# Altium PCB 51MCU最小系统.PcbDoc
Units mil, origin at the board's own origin, x right, y up, seen from the top; angles counter-clockwise.
Board outline 6000 x 4000 mil, 2 copper layers (Top Layer, Bottom Layer); 14 components, 41 nets, 107 pads, 0 vias.
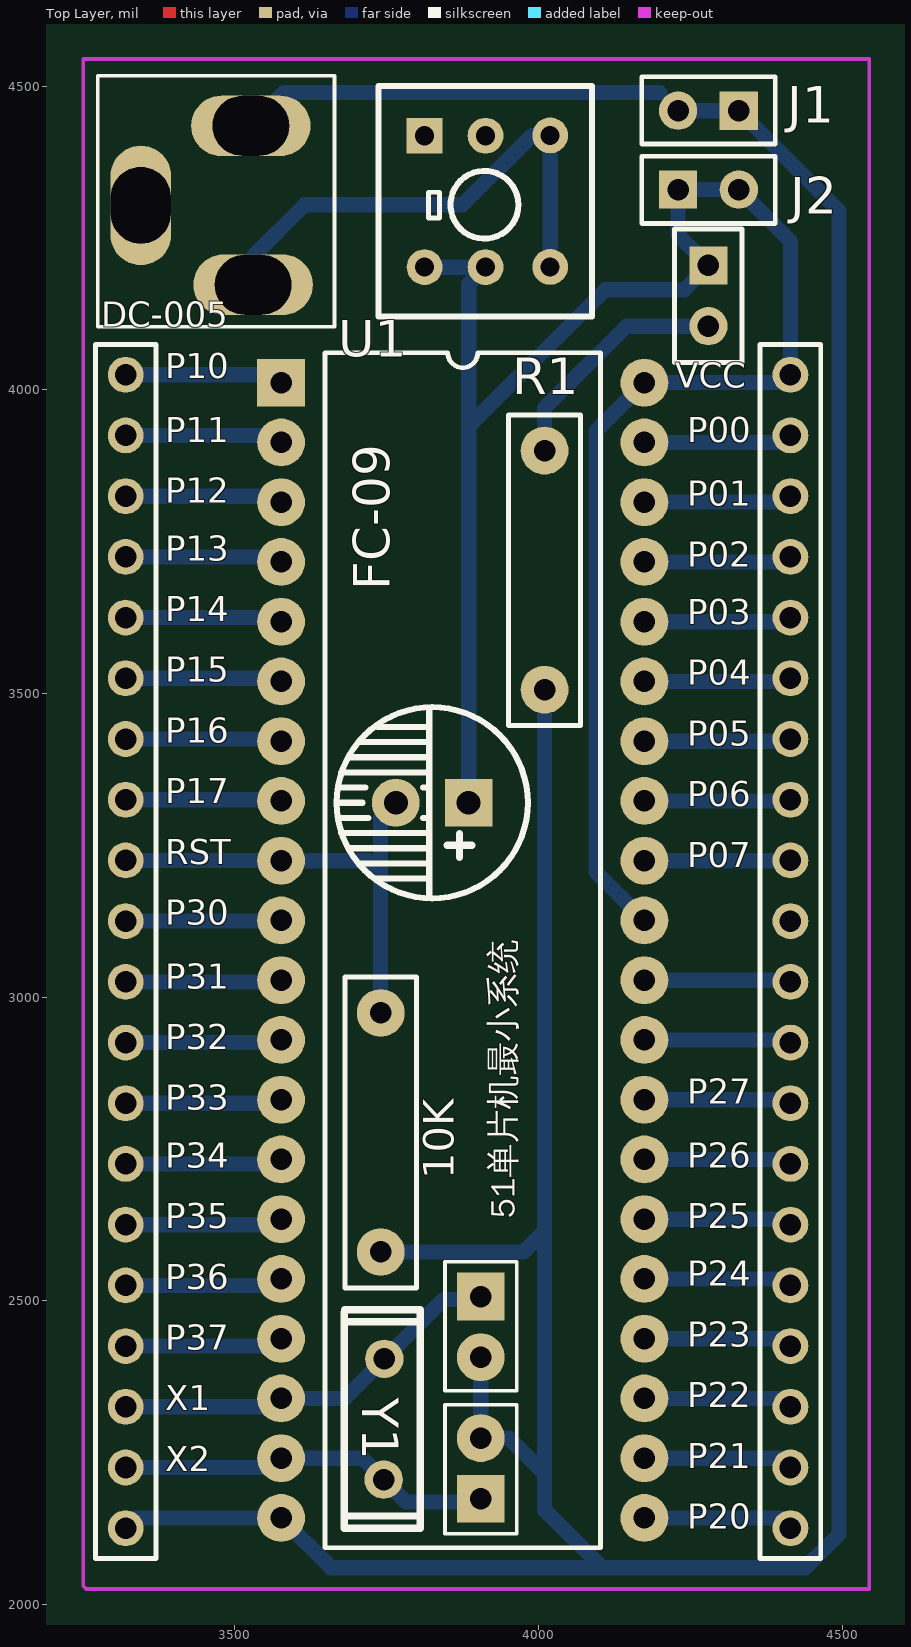
[diagram p0: Top Layer view]
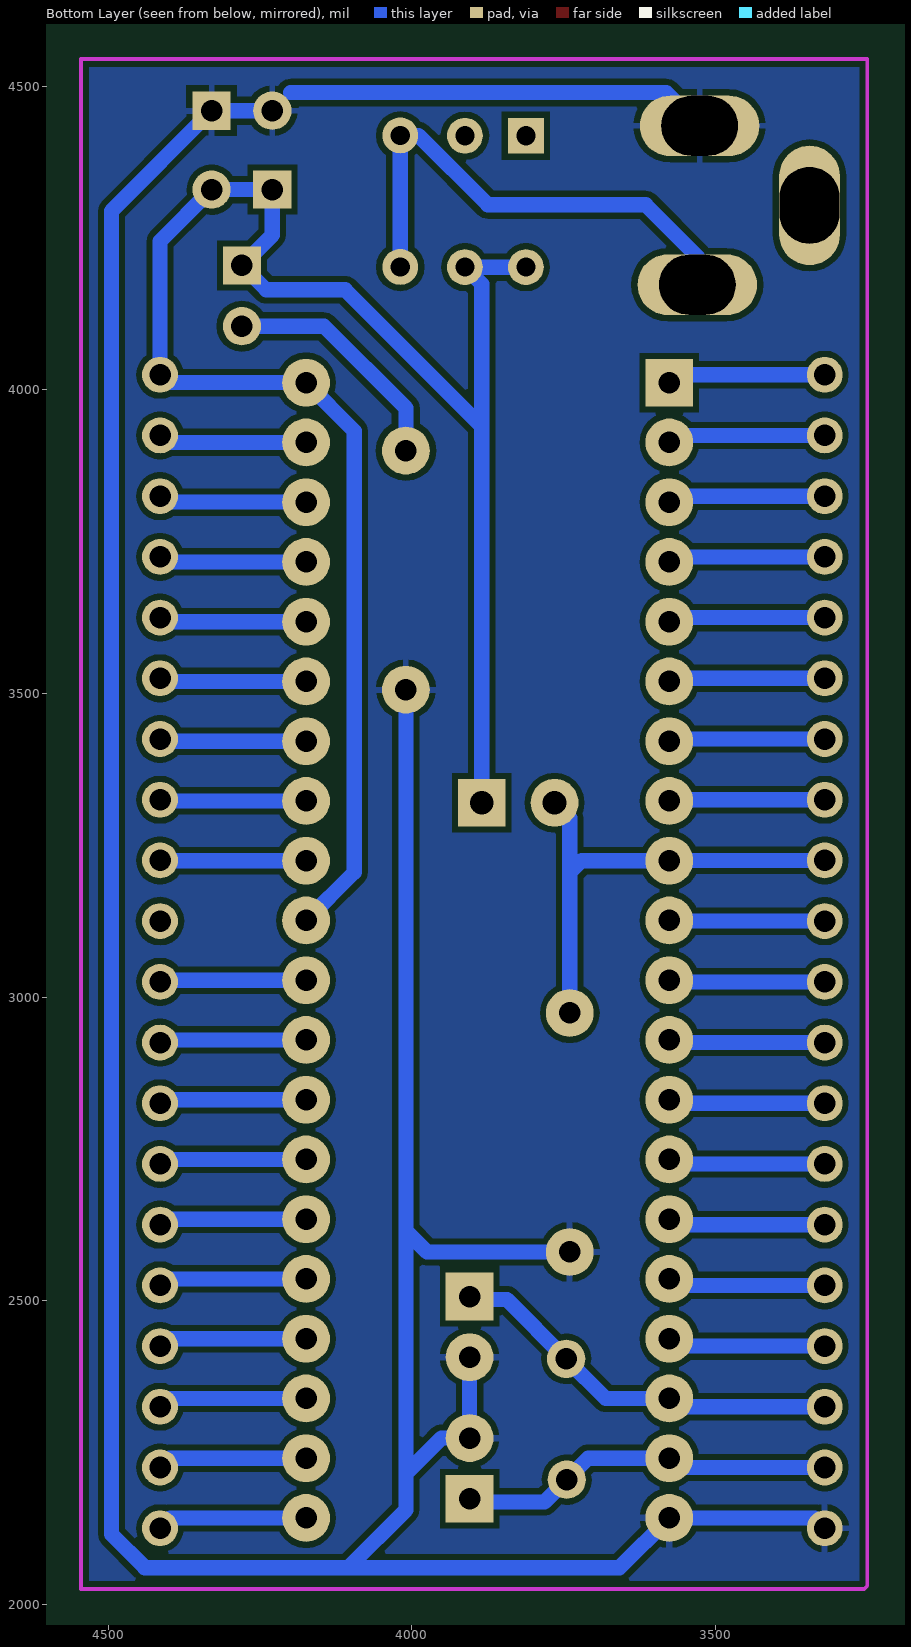
[diagram p1: Bottom Layer view, seen from below]

## Layer stack, top to bottom
Top Solder: solder mask 0.4, Solder Resist, Dk 3.5
Top Layer: signal copper 1.4
Dielectric 1: dielectric 12.6, FR-4, Dk 4.8
Bottom Layer: signal copper 1.4
Bottom Solder: solder mask 0.4, Solder Resist, Dk 3.5

## Board outline
1000,1000 7000,1000 7000,5000 1000,5000

## Design rules (kind name [scope] priority, off if disabled: settings)
Clearance [All] p1: gap=10
ComponentClearance [All] p1: gap=0 collisioncheckmode=3 verticalgap=0 showdistances=FALSE
PolygonConnect [All] p1: connectstyle=Relief reliefconductorwidth=10 reliefentries=4 polygonreliefangle="90 Angle" airgapwidth=10
RoutingVias [All] p1: holewidth=28 width=50 viastyle="Through Hole" minholewidth=28 minwidth=50 maxholewidth=28 maxwidth=50
SolderMaskExpansion [All] p1: expansion=4
Width [All] p1: maxlimit=25 minlimit=10 preferedwidth=10
28 further rules are at their usual default settings.

## Components (designator, comment, footprint, x,y, rotation, side; value= is the part's Value field where it differs from the comment)
10K "10K" "Res-dip - duplicate" 3740,2580 r270 top (schematic designator R2)
C1 "22pf" CAP_2.54_NO_ele 3905,2505 r270 top
C2 "22pf" CAP_2.54_NO_ele 3905,2175 r90 top
D1 "LED-Diode-DIP" LED_DIP 4280,4205 r270 top
FC-09 "10uF" Cap_3.0 3885,3320 r180 top (schematic designator C3)
J1 "Header 2" "Header 2" 4330,4460 r180 top
J2 "Header 2" "Header 2" 4230,4330 r0 top
J3 "Header 20" "Header 20" 3320,4025 r270 top
J4 "Header 20" "Header 20" 4415,4025 r270 top
R1 "4.7K" "Res-dip - duplicate" 4010,3900 r90 top
S1 "KEY-6" Key-6 3910,4305 r90 top
S2 "DC-005" DC-005 3530,4435 r0 top
U1 "STC89C52" DIP-40 3575,4010 r0 top
Y1 "11.0592M" XTAL_SOP 3745,2205 r270 top

## Footprints (in the part's own frame and the unit in brackets; to place one, negate y for a bottom-side part, rotate by r counter-clockwise, add the part's x,y. Pads: shape width x height; smd on the part's side, far side on the other; paste and mask are expansions set on the pad)
CAP_2.54_NO_ele [mm]
  rect 2x2 hole 0.9: 1(-0.04,0)
  round 2 hole 0.9: 2(2.5,0)
  silkscreen extent -1.5,-1.5 3.9,1.5
Cap_3.0 [mm]
  rect 2x2 hole 1: 1(0,0)
  round 2 hole 1: 2(3.048,0)
  silkscreen extent -2.48,-4 5.52,4
DC-005 [mm]
  oval 5x2.54 hole 2.5 slot 3.2 at 0 deg: 1(-0.1,0) 2(0,-6.65)
  oval 2.54x5 hole 2.5 slot 3.2 at 90 deg: 3(-4.7,-3.325)
  silkscreen extent -6.5,-8.4 3.4,2.1
DIP-40 [mm]
  rect 2x2 hole 0.9: 1(0.025,0.051)
  round 2 hole 0.9: 2(0.025,-2.449) 3(0.025,-4.949) 4(0.025,-7.449) 5(0.025,-9.949) 6(0.025,-12.449) 7(0.025,-14.949) 8(0.025,-17.449) 9(0.025,-19.949) 10(0.025,-22.449) 11(0.025,-24.949) 12(0.025,-27.449) 13(0.025,-29.949) 14(0.025,-32.449) 15(0.025,-34.949) 16(0.025,-37.449) 17(0.025,-39.949) 18(0.025,-42.449) 19(0.025,-44.949) 20(0.025,-47.449) 21(15.225,-47.449) 22(15.225,-44.949) 23(15.225,-42.449) 24(15.225,-39.949) 25(15.225,-37.449) 26(15.225,-34.949) 27(15.225,-32.449) 28(15.225,-29.949) 29(15.225,-27.449) 30(15.225,-24.949) 31(15.225,-22.449) 32(15.225,-19.949) 33(15.225,-17.449) 34(15.225,-14.949) 35(15.225,-12.449) 36(15.225,-9.949) 37(15.225,-7.449) 38(15.225,-4.949) 39(15.225,-2.449) 40(15.225,0.051)
  silkscreen extent 1.86,-48.7 13.39,1.3
"Header 2" [mm]
  rect 1.6x1.6 hole 0.9: 1(0,0)
  round 1.6 hole 0.9: 2(2.54,0)
  silkscreen extent -1.52,-1.42 4.06,1.4
"Header 20" [mm]
  round 1.5 hole 0.9: 1(0,0) 2(2.54,0) 3(5.08,0) 4(7.62,0) 5(10.16,0) 6(12.7,0) 7(15.24,0) 8(17.78,0) 9(20.32,0) 10(22.86,0) 11(25.4,0) 12(27.94,0) 13(30.48,0) 14(33.02,0) 15(35.56,0) 16(38.1,0) 17(40.64,0) 18(43.18,0) 19(45.72,0) 20(48.26,0)
  silkscreen extent -1.27,-1.27 49.53,1.27
Key-6 [mm]
  rect 1.5x1.5 hole 0.8: 1(2.89,2.48)
  round 1.5 hole 0.8: 2(2.89,-0.07) 3(2.9,-2.775) 4(-2.6,-2.775) 5(-2.61,-0.07) 6(-2.61,2.48)
  silkscreen extent -4.67,-4.52 4.97,4.4
LED_DIP [mm]
  rect 1.6x1.6 hole 0.9: 1(0,0)
  round 1.6 hole 0.9: 2(2.54,0)
  silkscreen extent -1.52,-1.42 4.06,1.4
"Res-dip - duplicate" [mm]
  round 2 hole 0.9 paste+0 mask+0.102: 1(0,0) 2(-10,0)
  silkscreen extent -11.5,-1.5 1.5,1.5
XTAL_SOP [mm]
  round 1.6 hole 0.9: 1(0,0) 2(-5.055,0.025)
  silkscreen extent -7.11,-1.65 2.03,1.52

## Part data
10K R1: library part Res-DIP
C1 C2: library part C-dip
FC-09: library part C-ele
Y1: library part XTAL

## Nets (pads, with @x,y where several pads share a name; then routed paths per layer and width w, separated by ;. In a path a pad name is that pad's centre, name@x,y a point inside that pad or via, vN(x,y) a via of type N, cw(c..) or ccw(c..) an arc to the next point about the centre after c; other vN are vias at no path point)
GND: 10K.1 C1.2 C2.2 J1.1 J1.2 J3.20 R1.2 S2.1 U1.20 | length 6481.3
  Bottom Layer w25: J3.20 3336.92,2141.92 U1.20 3657.92,2060 4105,2060 ; S2.1 3581.06,4490 4200,4490 ; 10K.1 3975,2580 4010,2615 ; C1.2 C2.2 3951.57,2273.43 4010,2215 ; R1.2 4010,2615 ; J1.2 J1.1 4495,4295 4495,2115 4440,2060 4105,2060 ; 4010,2215 4010,2615 ; 4010,2215 4010,2155 4105,2060
NetD1_2: D1.2 R1.1 | length 395.9
  Bottom Layer w25: R1.1 4010,3970 4145,4105 D1.2
NetJ3_1: J3.1 U1.1 | length 261.4
  Bottom Layer w25: J3.1 3563,4025 U1.1
NetJ3_2: J3.2 U1.2 | length 260.7
  Bottom Layer w25: J3.2 3564.57,3925 U1.2
NetJ3_3: J3.3 U1.3 | length 260.1
  Bottom Layer w25: J3.3 3566.15,3825 U1.3
NetJ3_4: J3.4 U1.4 | length 259.4
  Bottom Layer w25: J3.4 3567.72,3725 U1.4
NetJ3_5: J3.5 U1.5 | length 258.8
  Bottom Layer w25: J3.5 3569.3,3625 U1.5
NetJ3_6: J3.6 U1.6 | length 258.1
  Bottom Layer w25: J3.6 3570.87,3525 U1.6
NetJ3_7: J3.7 U1.7 | length 257.5
  Bottom Layer w25: J3.7 3572.45,3425 U1.7
NetJ3_8: J3.8 U1.8 | length 256.8
  Bottom Layer w25: J3.8 3574.02,3325 U1.8
NetJ3_10: J3.10 U1.10 | length 256.5
  Bottom Layer w25: J3.10 3574.83,3125 U1.10
NetJ3_11: J3.11 U1.11 | length 257.1
  Bottom Layer w25: J3.11 3573.25,3025 U1.11
NetJ3_12: J3.12 U1.12 | length 257.8
  Bottom Layer w25: J3.12 3571.68,2925 U1.12
NetJ3_13: J3.13 U1.13 | length 258.4
  Bottom Layer w25: J3.13 3570.1,2825 U1.13
NetJ3_14: J3.14 U1.14 | length 259.1
  Bottom Layer w25: J3.14 3568.53,2725 U1.14
NetJ3_15: J3.15 U1.15 | length 259.7
  Bottom Layer w25: J3.15 3566.95,2625 U1.15
NetJ3_16: J3.16 U1.16 | length 260.4
  Bottom Layer w25: J3.16 3565.38,2525 U1.16
NetJ3_17: J3.17 U1.17 | length 261.1
  Bottom Layer w25: J3.17 3563.8,2425 U1.17
NetJ4_2: J4.2 U1.39 | length 245.3
  Bottom Layer w25: U1.39 4403.57,3913.57 J4.2
NetJ4_3: J4.3 U1.38 | length 244.7
  Bottom Layer w25: U1.38 4405.15,3815.15 J4.3
NetJ4_4: J4.4 U1.37 | length 244
  Bottom Layer w25: U1.37 4406.72,3716.72 J4.4
NetJ4_5: J4.5 U1.36 | length 243.4
  Bottom Layer w25: U1.36 4408.3,3618.3 J4.5
NetJ4_6: J4.6 U1.35 | length 242.7
  Bottom Layer w25: U1.35 4409.87,3519.87 J4.6
NetJ4_7: J4.7 U1.34 | length 242
  Bottom Layer w25: U1.34 4411.45,3421.45 J4.7
NetJ4_8: J4.8 U1.33 | length 241.4
  Bottom Layer w25: U1.33 4413.02,3323.02 J4.8
NetJ4_9: J4.9 U1.32 | length 240.7
  Bottom Layer w25: U1.32 4414.6,3224.6 J4.9
NetJ4_11: J4.11 U1.30 | length 241.7
  Bottom Layer w25: U1.30 4412.25,3027.75 J4.11
NetJ4_12: J4.12 U1.29 | length 242.4
  Bottom Layer w25: U1.29 4410.68,2929.32 J4.12
NetJ4_13: J4.13 U1.28 | length 243
  Bottom Layer w25: U1.28 4409.1,2830.9 J4.13
NetJ4_14: J4.14 U1.27 | length 243.7
  Bottom Layer w25: U1.27 4407.53,2732.47 J4.14
NetJ4_15: J4.15 U1.26 | length 244.3
  Bottom Layer w25: U1.26 4405.95,2634.05 J4.15
NetJ4_16: J4.16 U1.25 | length 245
  Bottom Layer w25: U1.25 4404.38,2535.62 J4.16
NetJ4_17: J4.17 U1.24 | length 245.6
  Bottom Layer w25: U1.24 4402.8,2437.2 J4.17
NetJ4_18: J4.18 U1.23 | length 246.3
  Bottom Layer w25: U1.23 4401.23,2338.77 J4.18
NetJ4_19: J4.19 U1.22 | length 246.9
  Bottom Layer w25: U1.22 4399.65,2240.35 J4.19
NetJ4_20: J4.20 U1.21 | length 247.6
  Bottom Layer w25: U1.21 4398.08,2141.92 J4.20
NetS1_3: S1.3 S1.4 S2.2 | length 835.1
  Bottom Layer w25: S2.2 3530,4220 3615,4305 3875,4305 3989.17,4419.17 S1.3 S1.4
RST: 10K.2 FC-09.2 J3.9 U1.9 | length 784.9
  Bottom Layer w25: J3.9 3575.6,3225 U1.9 3720.4,3224.6 3740,3205 ; 10K.2 3740,3205 ; FC-09.2 3740,3295 3740,3205
VCC: D1.1 FC-09.1 J2.1 J2.2 J4.1 S1.5 S1.6 U1.31 U1.40 | length 3282.4
  Bottom Layer w25: S1.6 S1.5 3885,4174.49 FC-09.1 ; 3885,3940 4110,4165 4240,4165 D1.1 4230,4255 J2.1 J2.2 4415,4245 J4.1 4402,4012 U1.40 4095,3932.57 4095,3205.6 U1.31
XTAL1: C2.1 J3.19 U1.19 Y1.1 | length 623.2
  Bottom Layer w25: J3.19 3560.65,2225 U1.19 3709.65,2240.35 Y1.1 3781.57,2168.43 3900,2168.43 C2.1
XTAL2: C1.1 J3.18 U1.18 Y1.2 | length 660.2
  Bottom Layer w25: J3.18 3562.23,2325 U1.18 3680.77,2338.77 Y1.2 3843.57,2501.57 3900,2501.57 C1.1
pads on no net: J4.10 S1.1 S1.2 S2.3

## Polygon pours and split planes (outlines as drawn)
GND on Bottom Layer "Keep-Out Layer-No Net" (solid, remove dead copper, pour order 2): 3250,4545 3250,2030 4540,2030 4545,2025 4545,4545 3250,4545

## Keep-outs
Keep-Out Layer:
  lines w6.06: 3250,2030 3255,2025 4545,2025 4545,4545 3250,4545 3250,2030

## Silkscreen, mask and mechanical layers (free items; w line width, h text height)
Top Overlay:
  text "DC-005" at 3280,4090 h70
  text "P10" at 3385,4005 h70
  text "VCC" at 4225,3990 h70
  text "P11" at 3385,3900 h70
  text "P00" at 4245,3900 h70
  text "P12" at 3385,3800 h70
  text "P01" at 4245,3795 h70
  text "P13" at 3385,3705 h70
  text "P02" at 4245,3695 h70
  text "P14" at 3385,3605 h70
  text "P03" at 4245,3600 h70
  text "P15" at 3385,3505 h70
  text "P04" at 4245,3500 h70
  text "P16" at 3385,3405 h70
  text "P05" at 4245,3400 h70
  text "P17" at 3385,3305 h70
  text "P06" at 4245,3300 h70
  text "RST" at 3385,3205 h70
  text "P07" at 4245,3200 h70
  text "P30" at 3385,3105 h70
  text "P31" at 3385,3000 h70
  text "P32" at 3385,2900 h70
  text "P27" at 4245,2810 h70
  text "P33" at 3385,2800 h70
  text "P34" at 3385,2705 h70
  text "P26" at 4245,2705 h70
  text "51单片机最小系统" at 3975,2635 h70 r90
  text "P35" at 3385,2605 h70
  text "P25" at 4245,2605 h70
  text "P24" at 4245,2510 h70
  text "P36" at 3385,2505 h70
  text "P23" at 4245,2410 h70
  text "P37" at 3385,2405 h70
  text "P22" at 4245,2310 h70
  text "X1" at 3385,2305 h70
  text "P21" at 4245,2210 h70
  text "X2" at 3385,2205 h70
  text "P20" at 4245,2110 h70